# EAGLE board EtchSketch (EAGLE 9.6.2)
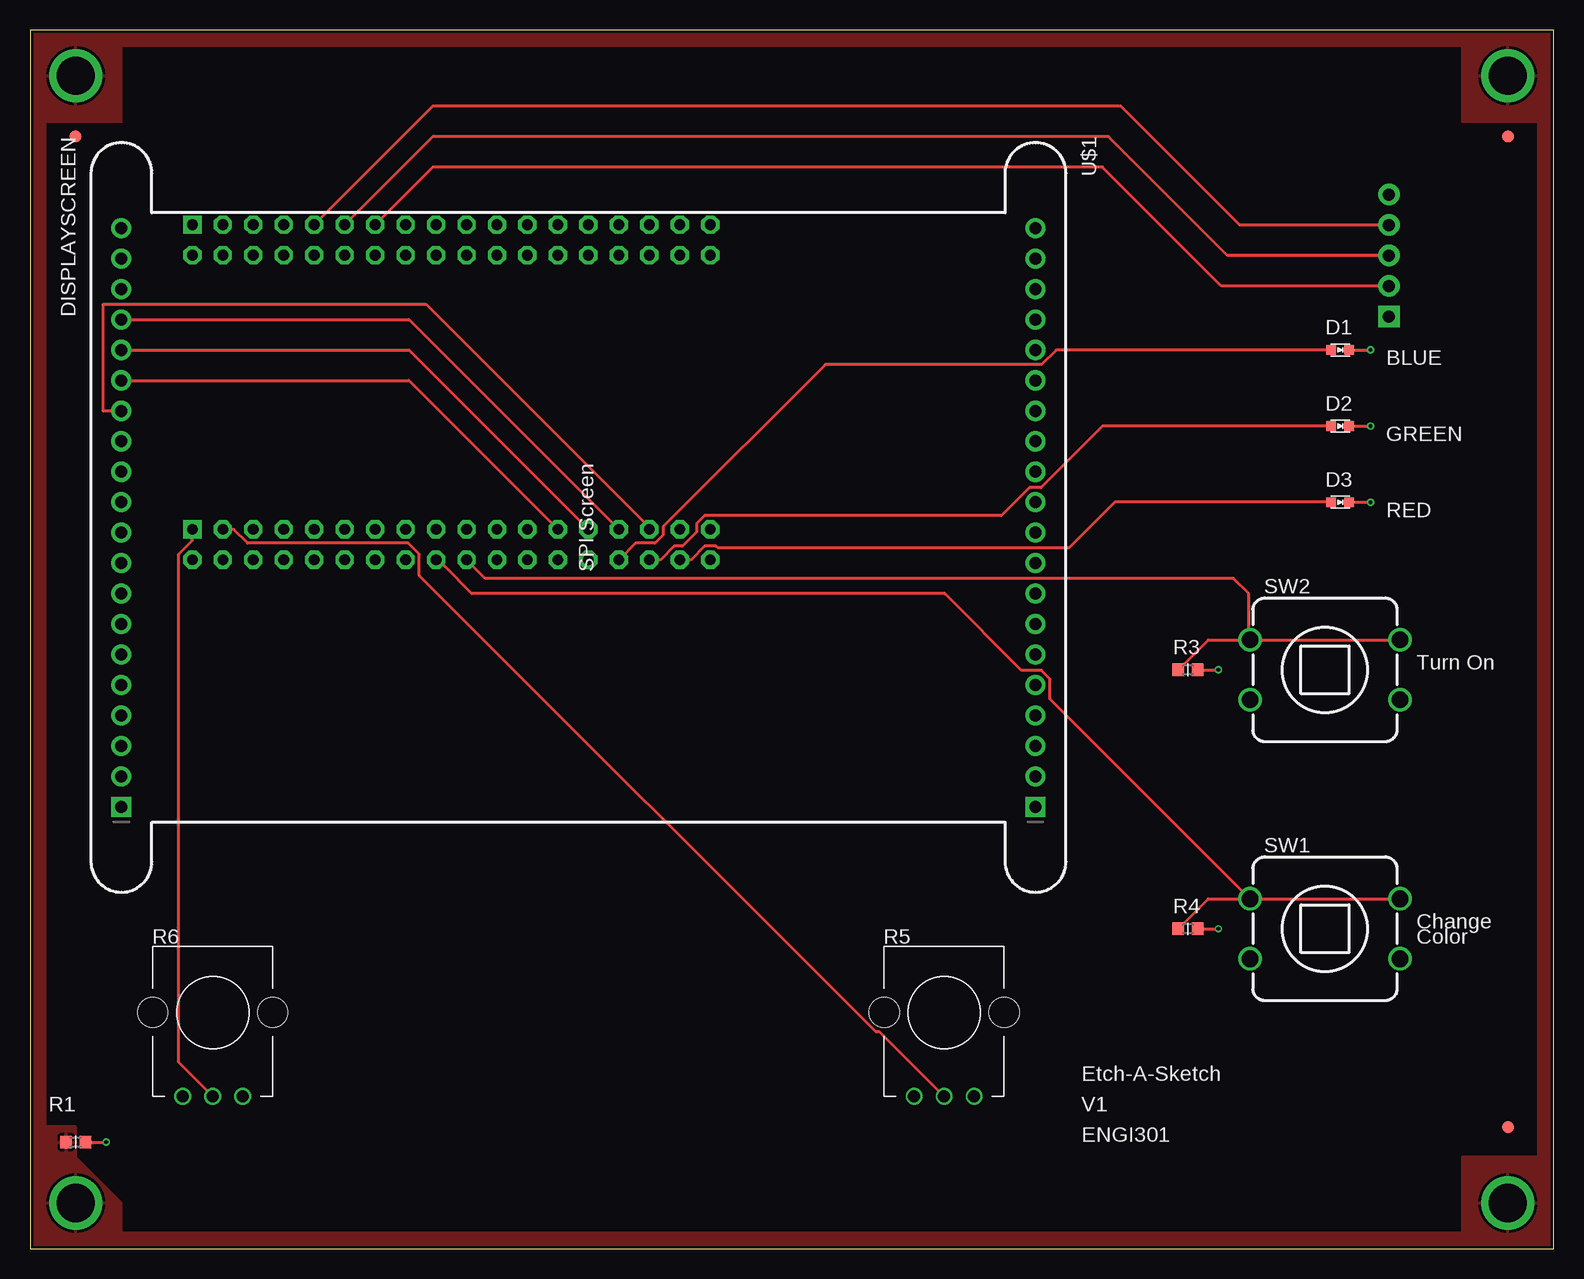
[diagram p0: board, top side]
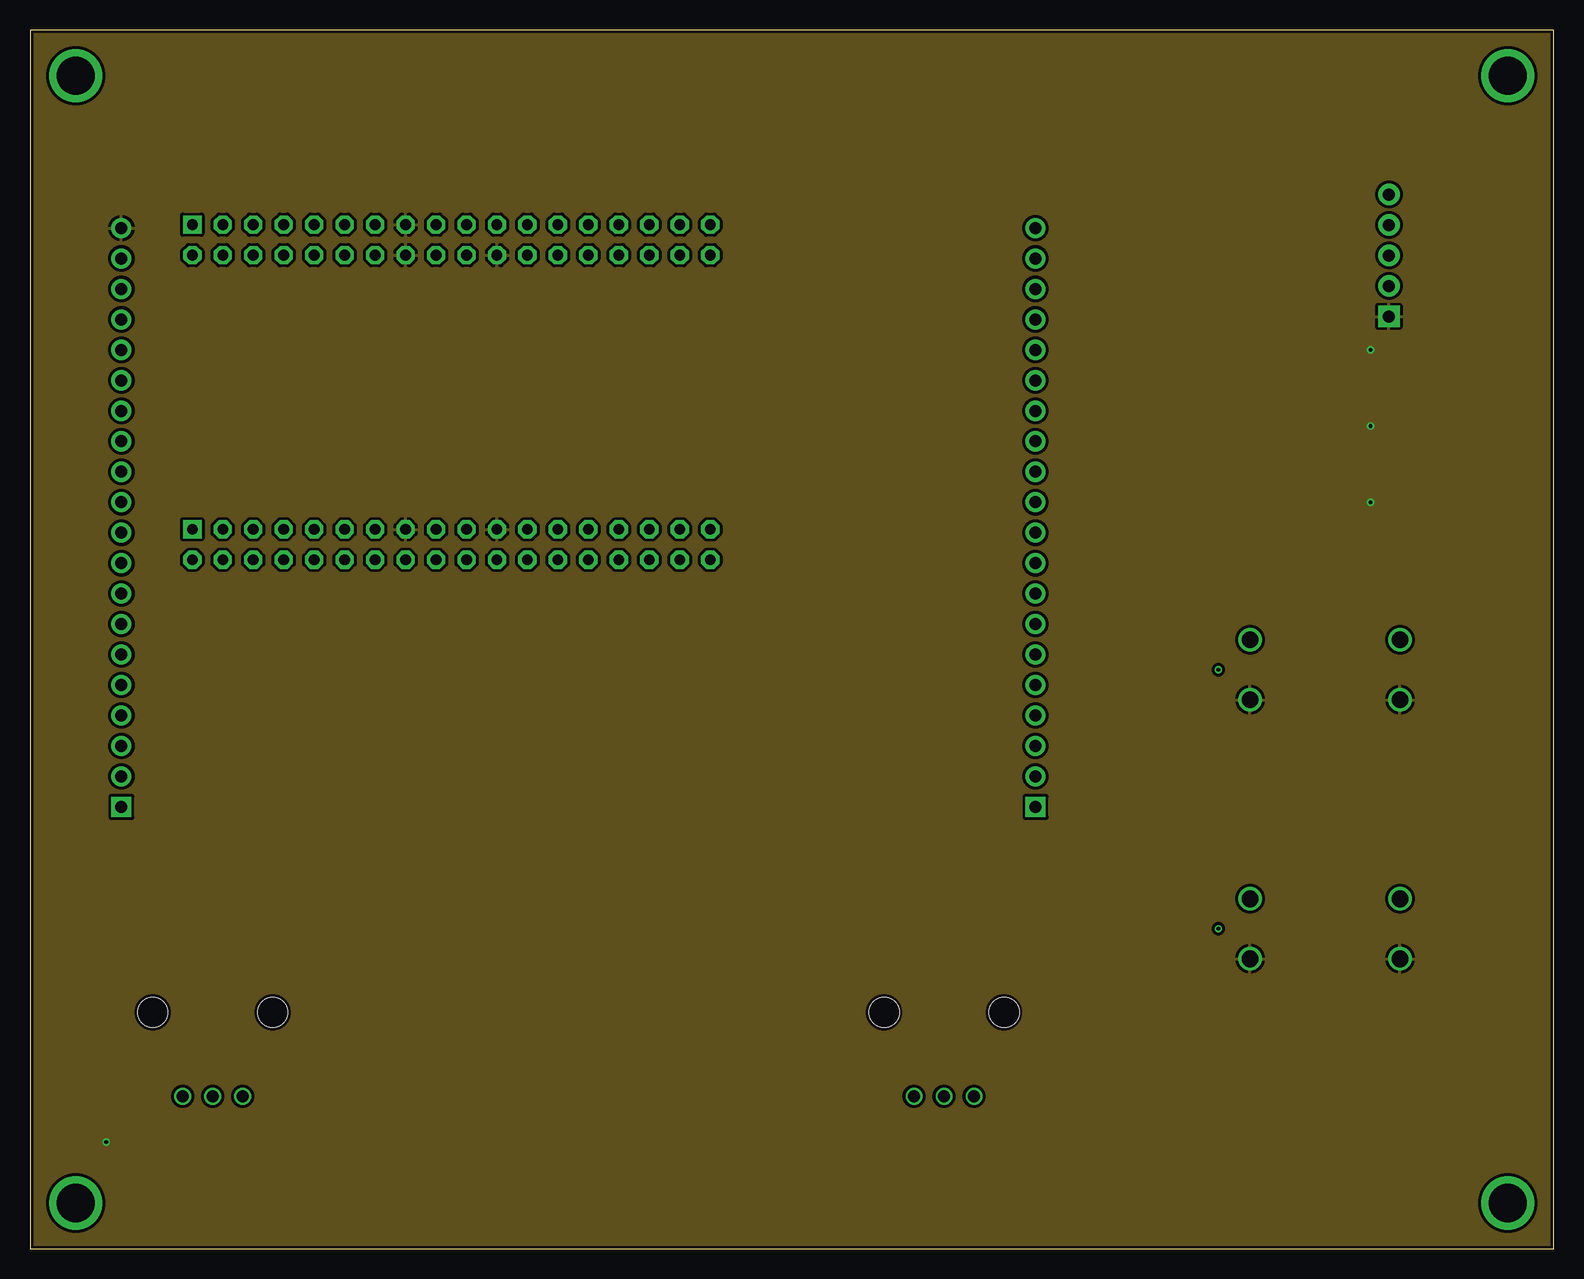
[diagram p1: board, inner layer Route2]
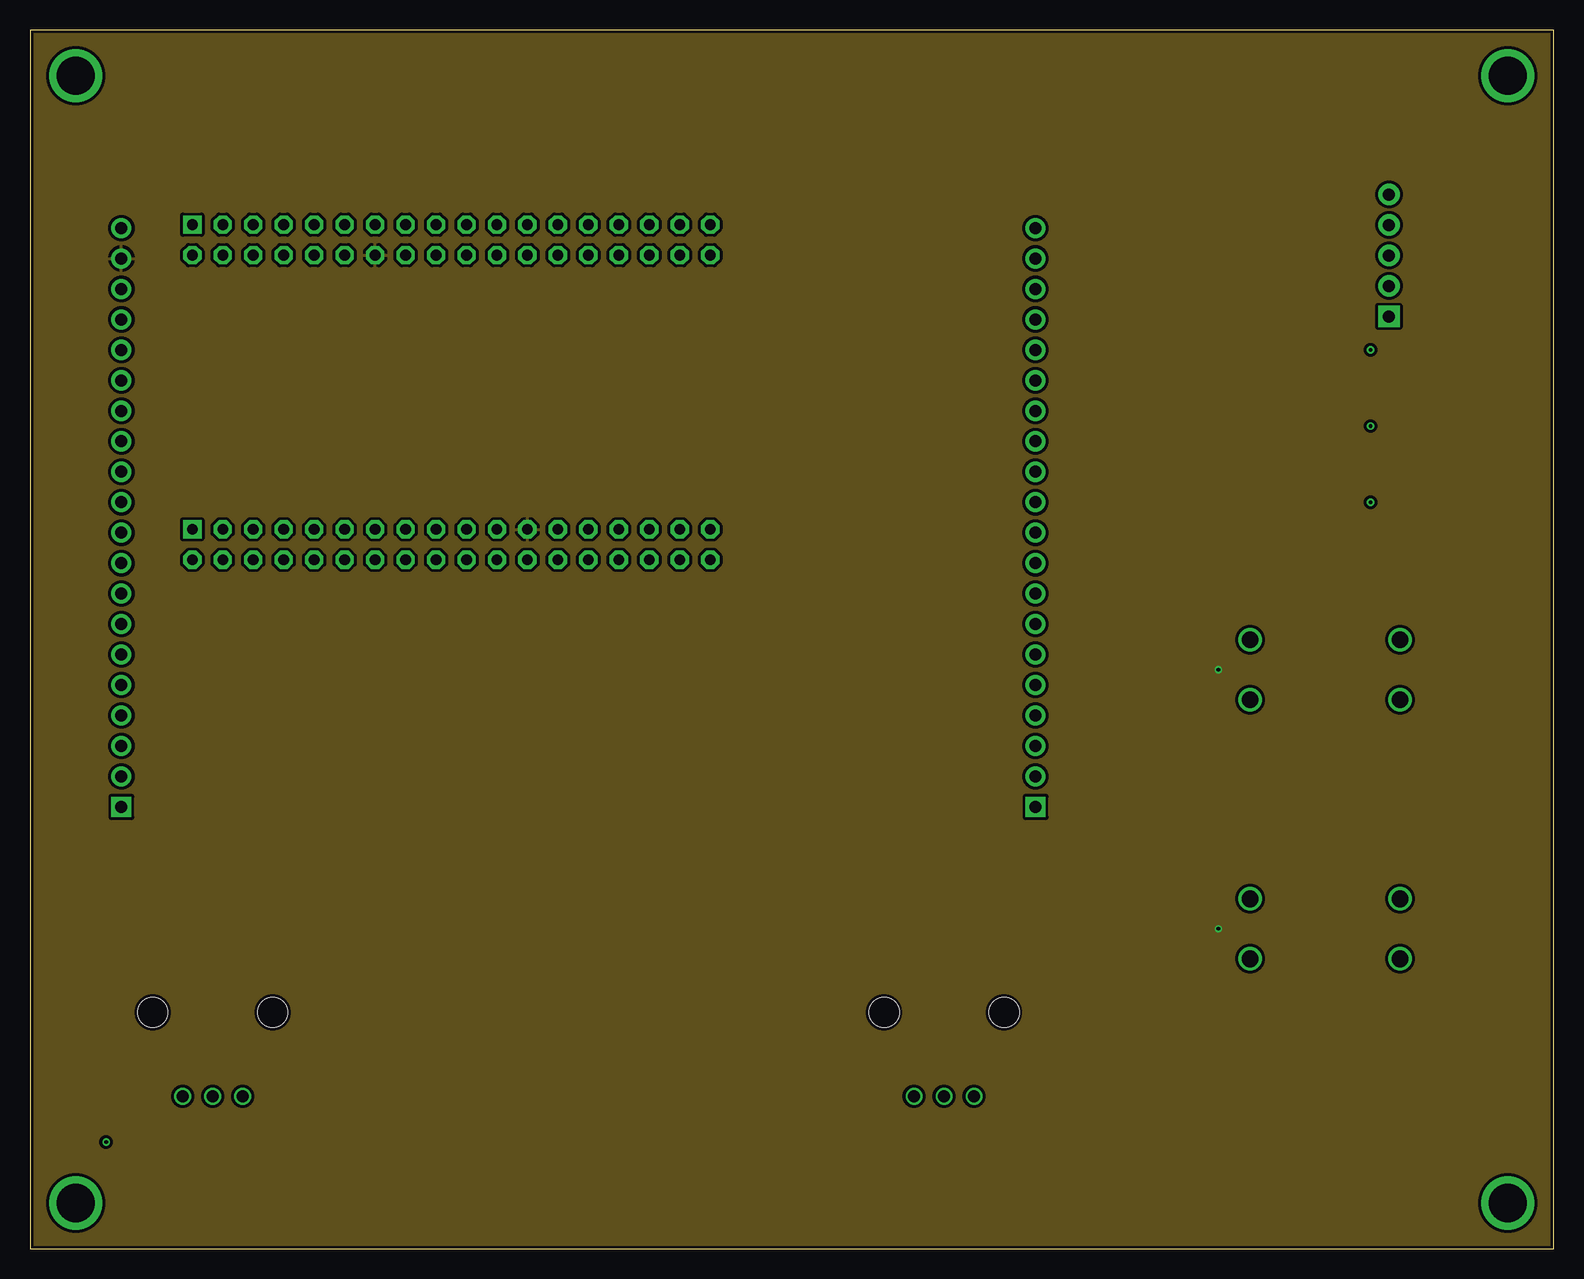
[diagram p2: board, inner layer Route15]
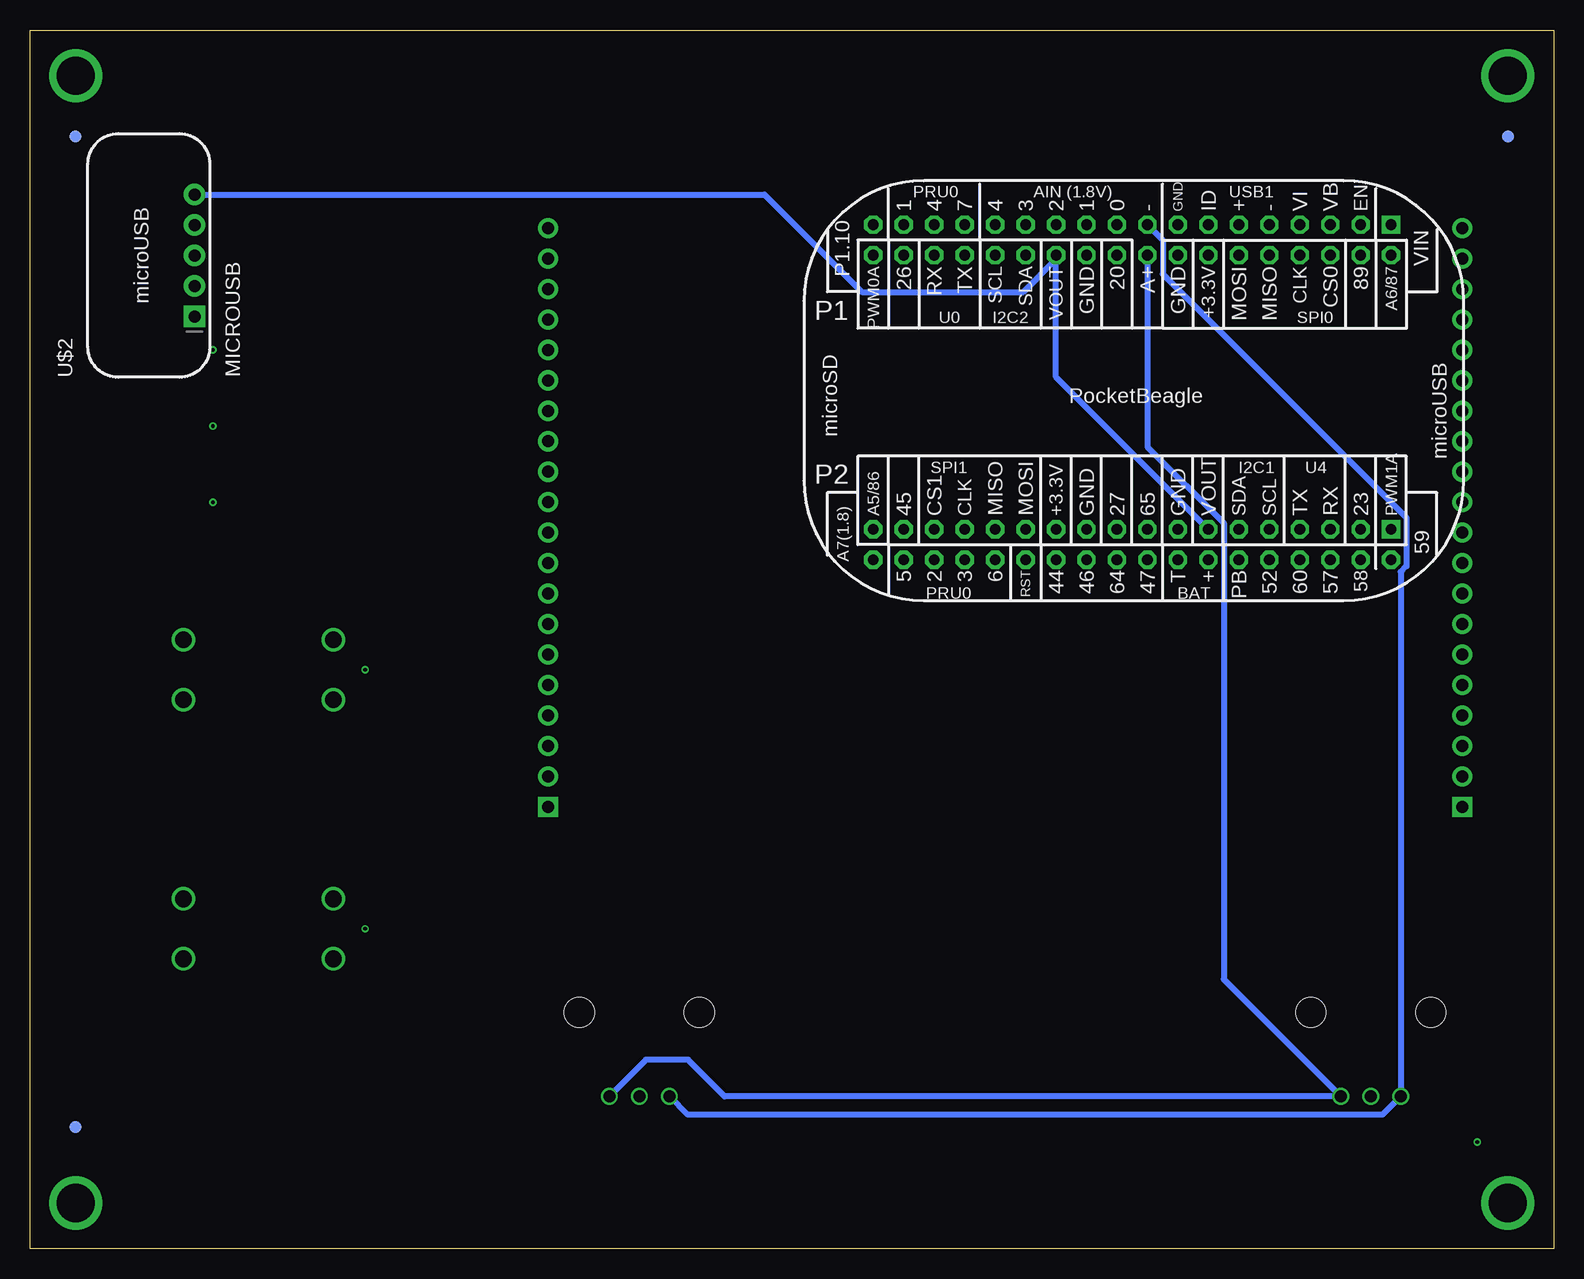
[diagram p3: board, bottom side, seen from below]

Size 127 x 101.6 mm. Coordinates in mm from the lower left corner, seen from the top.
Outline: 0,0 127,0 127,101.6 0,101.6 0,0
Copper layers (1*2*15*16): Top 0.035mm / dielectric 0.23mm / Route2 0.035mm / dielectric 0.93mm / Route15 0.035mm / dielectric 0.23mm / Bottom 0.035mm
Design rules "ENGI301_4lyr (1)": minimum track width 10mil, minimum drill 12mil, track to track 10mil, track to pad 10mil, pad to pad 10mil, via to via 10mil, smd to smd 10mil, copper to edge 10mil, drill to drill 12mil, minimum pad ring 6mil, minimum via ring 6mil, stop-mask expansion 3mil, vias tented up to drill 25mil, thermal gap 10mil

## Footprints (pad centres in the part's own frame; a part is rotated, then mirrored left to right if it is on the bottom)
EIA-STD = smd 0.8 x 0.8: ANODE -0.75,0; CATHODE 0.75,0
FIDUCIAL_40MIL = smd 1.016 x 1.016: P$1 0,0
MOUNTING_HOLE = drill 3.175 pad 4.445: P$1 0,0
R0603 = smd 0.95 x 1.031: 1 -0.8,0; 2 0.8,0
POT-PO90S = drill 1: CCW -2.5,0; CW 2.5,0; S 0,0 | hole 2.5: -5,7; 5,7
BUTTON_12.5MM = drill 1.4: 1 -6.25,2.5; 2 -6.25,-2.5; 3 6.25,2.5; 4 6.25,-2.5
POCKETBEAGLE = drill 0.889 pad 1.524 square: P1_01 5.91,3.53; P2_01 5.91,28.93 | drill 0.889 pad 1.524 octagon: P1_02 5.91,6.07; P1_03 8.45,3.53; P1_04 8.45,6.07; P1_05 10.99,3.53; P1_06 10.99,6.07; P1_07 13.53,3.53; P1_08 13.53,6.07; P1_09 16.07,3.53; P1_10 16.07,6.07; P1_11 18.61,3.53; P1_12 18.61,6.07; P1_13 21.15,3.53; P1_14 21.15,6.07; P1_15 23.69,3.53; P1_16 23.69,6.07; P1_17 26.23,3.53; P1_18 26.23,6.07; P1_19 28.77,3.53; P1_20 28.77,6.07; P1_21 31.31,3.53; P1_22 31.31,6.07; P1_23 33.85,3.53; P1_24 33.85,6.07; P1_25 36.39,3.53; P1_26 36.39,6.07; P1_27 38.93,3.53; P1_28 38.93,6.07; P1_29 41.47,3.53; P1_30 41.47,6.07; P1_31 44.01,3.53; P1_32 44.01,6.07; P1_33 46.55,3.53; P1_34 46.55,6.07; P1_35 49.09,3.53; P1_36 49.09,6.07; P2_02 5.91,31.47; P2_03 8.45,28.93; P2_04 8.45,31.47; P2_05 10.99,28.93; P2_06 10.99,31.47; P2_07 13.53,28.93; P2_08 13.53,31.47; P2_09 16.07,28.93; P2_10 16.07,31.47; P2_11 18.61,28.93; P2_12 18.61,31.47; P2_13 21.15,28.93; P2_14 21.15,31.47; P2_15 23.69,28.93; P2_16 23.69,31.47; P2_17 26.23,28.93; P2_18 26.23,31.47; P2_19 28.77,28.93; P2_20 28.77,31.47; P2_21 31.31,28.93; P2_22 31.31,31.47; P2_23 33.85,28.93; P2_24 33.85,31.47; P2_25 36.39,28.93; P2_26 36.39,31.47; P2_27 38.93,28.93; P2_28 38.93,31.47; P2_29 41.47,28.93; P2_30 41.47,31.47; P2_31 44.01,28.93; P2_32 44.01,31.47; P2_33 46.55,28.93; P2_34 46.55,31.47; P2_35 49.09,28.93; P2_36 49.09,31.47
DISPLAYSCREEN = drill 1 pad 1.676 square: 1@JP1 24.13,38.1; 1@JP2 24.13,-38.1 | drill 1 pad 1.676: 2@JP1 21.59,38.1; 2@JP2 21.59,-38.1; 3@JP1 19.05,38.1; 3@JP2 19.05,-38.1; 4@JP1 16.51,38.1; 4@JP2 16.51,-38.1; 5@JP1 13.97,38.1; 5@JP2 13.97,-38.1; 6@JP1 11.43,38.1; 6@JP2 11.43,-38.1; 7@JP1 8.89,38.1; 7@JP2 8.89,-38.1; 8@JP1 6.35,38.1; 8@JP2 6.35,-38.1; 9@JP1 3.81,38.1; 9@JP2 3.81,-38.1; 10@JP1 1.27,38.1; 10@JP2 1.27,-38.1; 11@JP1 -1.27,38.1; 11@JP2 -1.27,-38.1; 12@JP1 -3.81,38.1; 12@JP2 -3.81,-38.1; 13@JP1 -6.35,38.1; 13@JP2 -6.35,-38.1; 14@JP1 -8.89,38.1; 14@JP2 -8.89,-38.1; 15@JP1 -11.43,38.1; 15@JP2 -11.43,-38.1; 16@JP1 -13.97,38.1; 16@JP2 -13.97,-38.1; 17@JP1 -16.51,38.1; 17@JP2 -16.51,-38.1; 18@JP1 -19.05,38.1; 18@JP2 -19.05,-38.1; 19@JP1 -21.59,38.1; 19@JP2 -21.59,-38.1; 20@JP1 -24.13,38.1; 20@JP2 -24.13,-38.1
MICROUSB = drill 1 pad 1.778 square: 1@JP2 5.08,1.27 | drill 1 pad 1.778: 2@JP2 7.62,1.27; 3@JP2 10.16,1.27; 4@JP2 12.7,1.27; 5@JP2 15.24,1.27

## Placement (x,y rotation side)
D1  LED BLUE  [EIA-STD]  109.22,74.93 0 top
D2  LED GREEN  [EIA-STD]  109.22,68.58 0 top
D3  LED RED  [EIA-STD]  109.22,62.23 0 top
FUD1  FIDUCIAL  [FIDUCIAL_40MIL]  3.81,92.71 0 top
FUD2  FIDUCIAL  [FIDUCIAL_40MIL]  123.19,92.71 0 top
FUD3  FIDUCIAL  [FIDUCIAL_40MIL]  123.19,10.16 0 top
FUD4  FIDUCIAL  [FIDUCIAL_40MIL]  3.81,92.71 90 bottom
FUD5  FIDUCIAL  [FIDUCIAL_40MIL]  123.19,92.71 0 bottom
FUD6  FIDUCIAL  [FIDUCIAL_40MIL]  123.19,10.16 0 bottom
MGT1  MOUNTING_HOLE  [MOUNTING_HOLE]  3.81,3.81 0 top
MGT2  MOUNTING_HOLE  [MOUNTING_HOLE]  3.81,97.79 0 top
MGT3  MOUNTING_HOLE  [MOUNTING_HOLE]  123.19,97.79 0 top
MGT4  MOUNTING_HOLE  [MOUNTING_HOLE]  123.19,3.81 0 top
R1  [R0603]  3.81,8.89 180 top
R3  [R0603]  96.52,48.26 0 top
R4  [R0603]  96.52,26.67 0 top
R5  POTENTIOMETER  [POT-PO90S]  76.2,12.7 0 top
R6  POTENTIOMETER  [POT-PO90S]  15.24,12.7 0 top
SW1  PUSH_BUTTON  [BUTTON_12.5MM]  107.95,26.67 0 top
SW2  PUSH_BUTTON  [BUTTON_12.5MM]  107.95,48.26 0 top
U1  POCKETBEAGLE_NEW  [POCKETBEAGLE]  7.62,88.9 180 bottom
U$1  DISPLAYSCREEN  [DISPLAYSCREEN]  45.72,60.96 270 top
U$2  MICROUSB  [MICROUSB]  112.01,72.64 90 bottom

## Library data of the parts
D1-D3 FUD1-FUD6 MGT1-MGT4 R1 R3-R6 SW1 SW2 U1 U$1 U$2 = EtchSketch

## Nets
AGND: R5.CCW R6.CCW U1.P1_17
BUTTON1: R3.1 SW2.1 SW2.3 U1.P2_20
BUTTON2: R4.1 SW1.1 SW1.3 U1.P2_18
CGND: MGT1.P$1 MGT2.P$1 MGT3.P$1 MGT4.P$1 R1.2
GND: D1.CATHODE D2.CATHODE D3.CATHODE R1.1 SW1.2 SW1.4 SW2.2 SW2.4 U1.P1_15 U1.P1_16 U1.P1_22 U1.P2_15 U1.P2_21 U$1.20@JP2 U$2.1@JP2
LED_BLUE: D1.ANODE U1.P2_30
LED_GREEN: D2.ANODE U1.P2_32
LED_RED: D3.ANODE U1.P2_34
POT1: R5.S U1.P2_03
POT2: R6.S U1.P2_01
SPI_CLK: U1.P2_29 U$1.17@JP2
SPI_CS: U1.P2_31 U$1.14@JP2
SPI_MISO: U1.P2_27 U$1.16@JP2
SPI_MOSI: U1.P2_25 U$1.15@JP2
USB_D+: U1.P1_11 U$2.3@JP2
USB_D-: U1.P1_09 U$2.4@JP2
USB_ID: U1.P1_13 U$2.2@JP2
VDD_1P8V: R5.CW R6.CW U1.P1_18
VDD_3P3V: R3.2 R4.2 U1.P1_14 U1.P2_23 U$1.19@JP2
VDD_5V: U1.P1_24 U1.P2_13 U$2.5@JP2

## Tracks (layer width: path | path; a pad name or v marks a point on that pad's centre or on a via)
AGND
  Bottom 0.508: U1.P1_17 32.58,84.1 32.58,81.26 12.26,60.94 12.26,56.9 12.74,56.42 R6.CCW 14.26,11.18 72.18,11.18 R5.CCW
BUTTON1
  Top 0.254: SW2.1 SW2.3 | R3.1 98.22,50.76 SW2.1 | SW2.1 101.6,50.86 101.6,54.61 100.33,55.88 37.94,55.88 U1.P2_20
BUTTON2
  Top 0.254: SW1.1 SW1.3 | R4.1 98.22,29.17 SW1.1 | SW1.1 85.04,45.83 85.04,47.49 84.33,48.21 82.66,48.21 76.26,54.61 36.83,54.61 34.54,56.9 34.29,57.15 34.01,57.43 U1.P2_18
CGND
  pour Top: 1.27,88.9 1.27,93.98 7.62,93.98 7.62,100.33 41.91,100.33 119.38,100.33 119.38,93.98 125.73,93.98 125.73,46.99 128.27,46.99 128.27,102.87 -1.27,102.87 -1.27,54.61 1.27,54.61
  pour Top: -1.27,54.61 -1.27,-1.27 128.27,-1.27 128.27,46.99 125.73,46.99 125.73,7.62 119.38,7.62 119.38,1.27 7.62,1.27 7.62,3.81 3.81,7.62 3.81,10.16 1.27,10.16 1.27,54.61
GND  (via drill 0.3 pad 0.61)
  Top 0.254: D3.CATHODE v111.76,62.23 | D2.CATHODE v111.76,68.58 | D1.CATHODE v111.76,74.93 | R1.1 v6.35,8.89
  pour Route2: -2.54,104.14 -2.54,-2.54 129.54,-2.54 129.54,104.14
LED_BLUE
  Top 0.254: D1.ANODE 85.54,74.93 84.33,73.71 66.29,73.71 52.77,60.19 52.77,59.5 52.1,58.83 50.49,58.83 U1.P2_30
LED_GREEN
  Top 0.254: D2.ANODE 89.41,68.58 84.28,63.45 83.31,63.45 80.98,61.11 56.24,61.11 55.57,60.44 55.57,59.75 54.39,58.57 53.7,58.57 52.55,57.43 U1.P2_32
LED_RED
  Top 0.254: D3.ANODE 90.42,62.23 86.61,58.42 57.34,58.42 57.18,58.57 56.24,58.57 55.09,57.43 U1.P2_34
POT1
  Top 0.254: R5.S 70.83,18.07 70.52,18.07 32.45,56.14 32.45,57.9 31.53,58.83 18.14,58.83 16.99,59.97 U1.P2_03
POT2
  Top 0.254: U1.P2_01 13.53,59.05 12.39,57.9 12.39,15.55 R6.S
SPI_CLK
  Top 0.254: U$1.17@JP2 31.59,77.47 U1.P2_29
SPI_CS
  Top 0.254: U$1.14@JP2 6.1,69.85 6.1,78.74 33.02,78.74 51.63,60.13 U1.P2_31
SPI_MISO
  Top 0.254: U$1.16@JP2 31.59,74.93 U1.P2_27
SPI_MOSI
  Top 0.254: U$1.15@JP2 31.59,72.39 U1.P2_25
USB_D+
  Top 0.254: U$2.3@JP2 99.82,82.8 89.92,92.71 33.57,92.71 U1.P1_11
USB_D-
  Top 0.254: U$2.4@JP2 100.84,85.34 90.93,95.25 33.57,95.25 U1.P1_09
USB_ID
  Top 0.254: U$2.2@JP2 99.31,80.26 89.41,90.17 33.57,90.17 U1.P1_13
VDD_1P8V
  Bottom 0.508: U1.P1_18 33.85,66.85 27.5,60.5 27.5,22.46 R6.CW 69.09,12.7 72.14,15.75 75.65,15.75 R5.CW
VDD_3P3V  (via drill 0.3 pad 0.61)
  Top 0.254: R4.2 v99.06,26.67 | R3.2 v99.06,48.26
  pour Route15: -5.08,106.68 -5.08,-5.08 132.08,-5.08 132.08,106.68
VDD_5V
  Bottom 0.508: 41.47,82.48 U1.P1_24 | U$2.5@JP2 65.79,87.88 57.66,79.76 44.2,79.76 41.47,82.48 | U1.P2_13 41.47,72.67 41.47,82.48

## Text on the board
tPlace: BLUE | GREEN | RED | Turn On | Change | Color | Etch-A-Sketch | V1 | ENGI301